# Altium PCB ZYNQ-HS-DEV-PCB.PcbDoc (part 5 of 13)
Units mm, origin at the board's own origin, x right, y up, seen from the top; angles counter-clockwise.
Board outline 125.73 x 111.93 mm, 10 copper layers (S1 (SIG), S2 (GND), S3 (SIG), S4 (GND), S5 (PWR), S6 (SIG), S7 (GND), S8 (SIG), S9 (GND), S10 (SIG)), stack 1.597 mm thick; 545 components, 400 nets, 2449 pads, 1577 vias.
Unrouted connection lines stored in the file: 309.
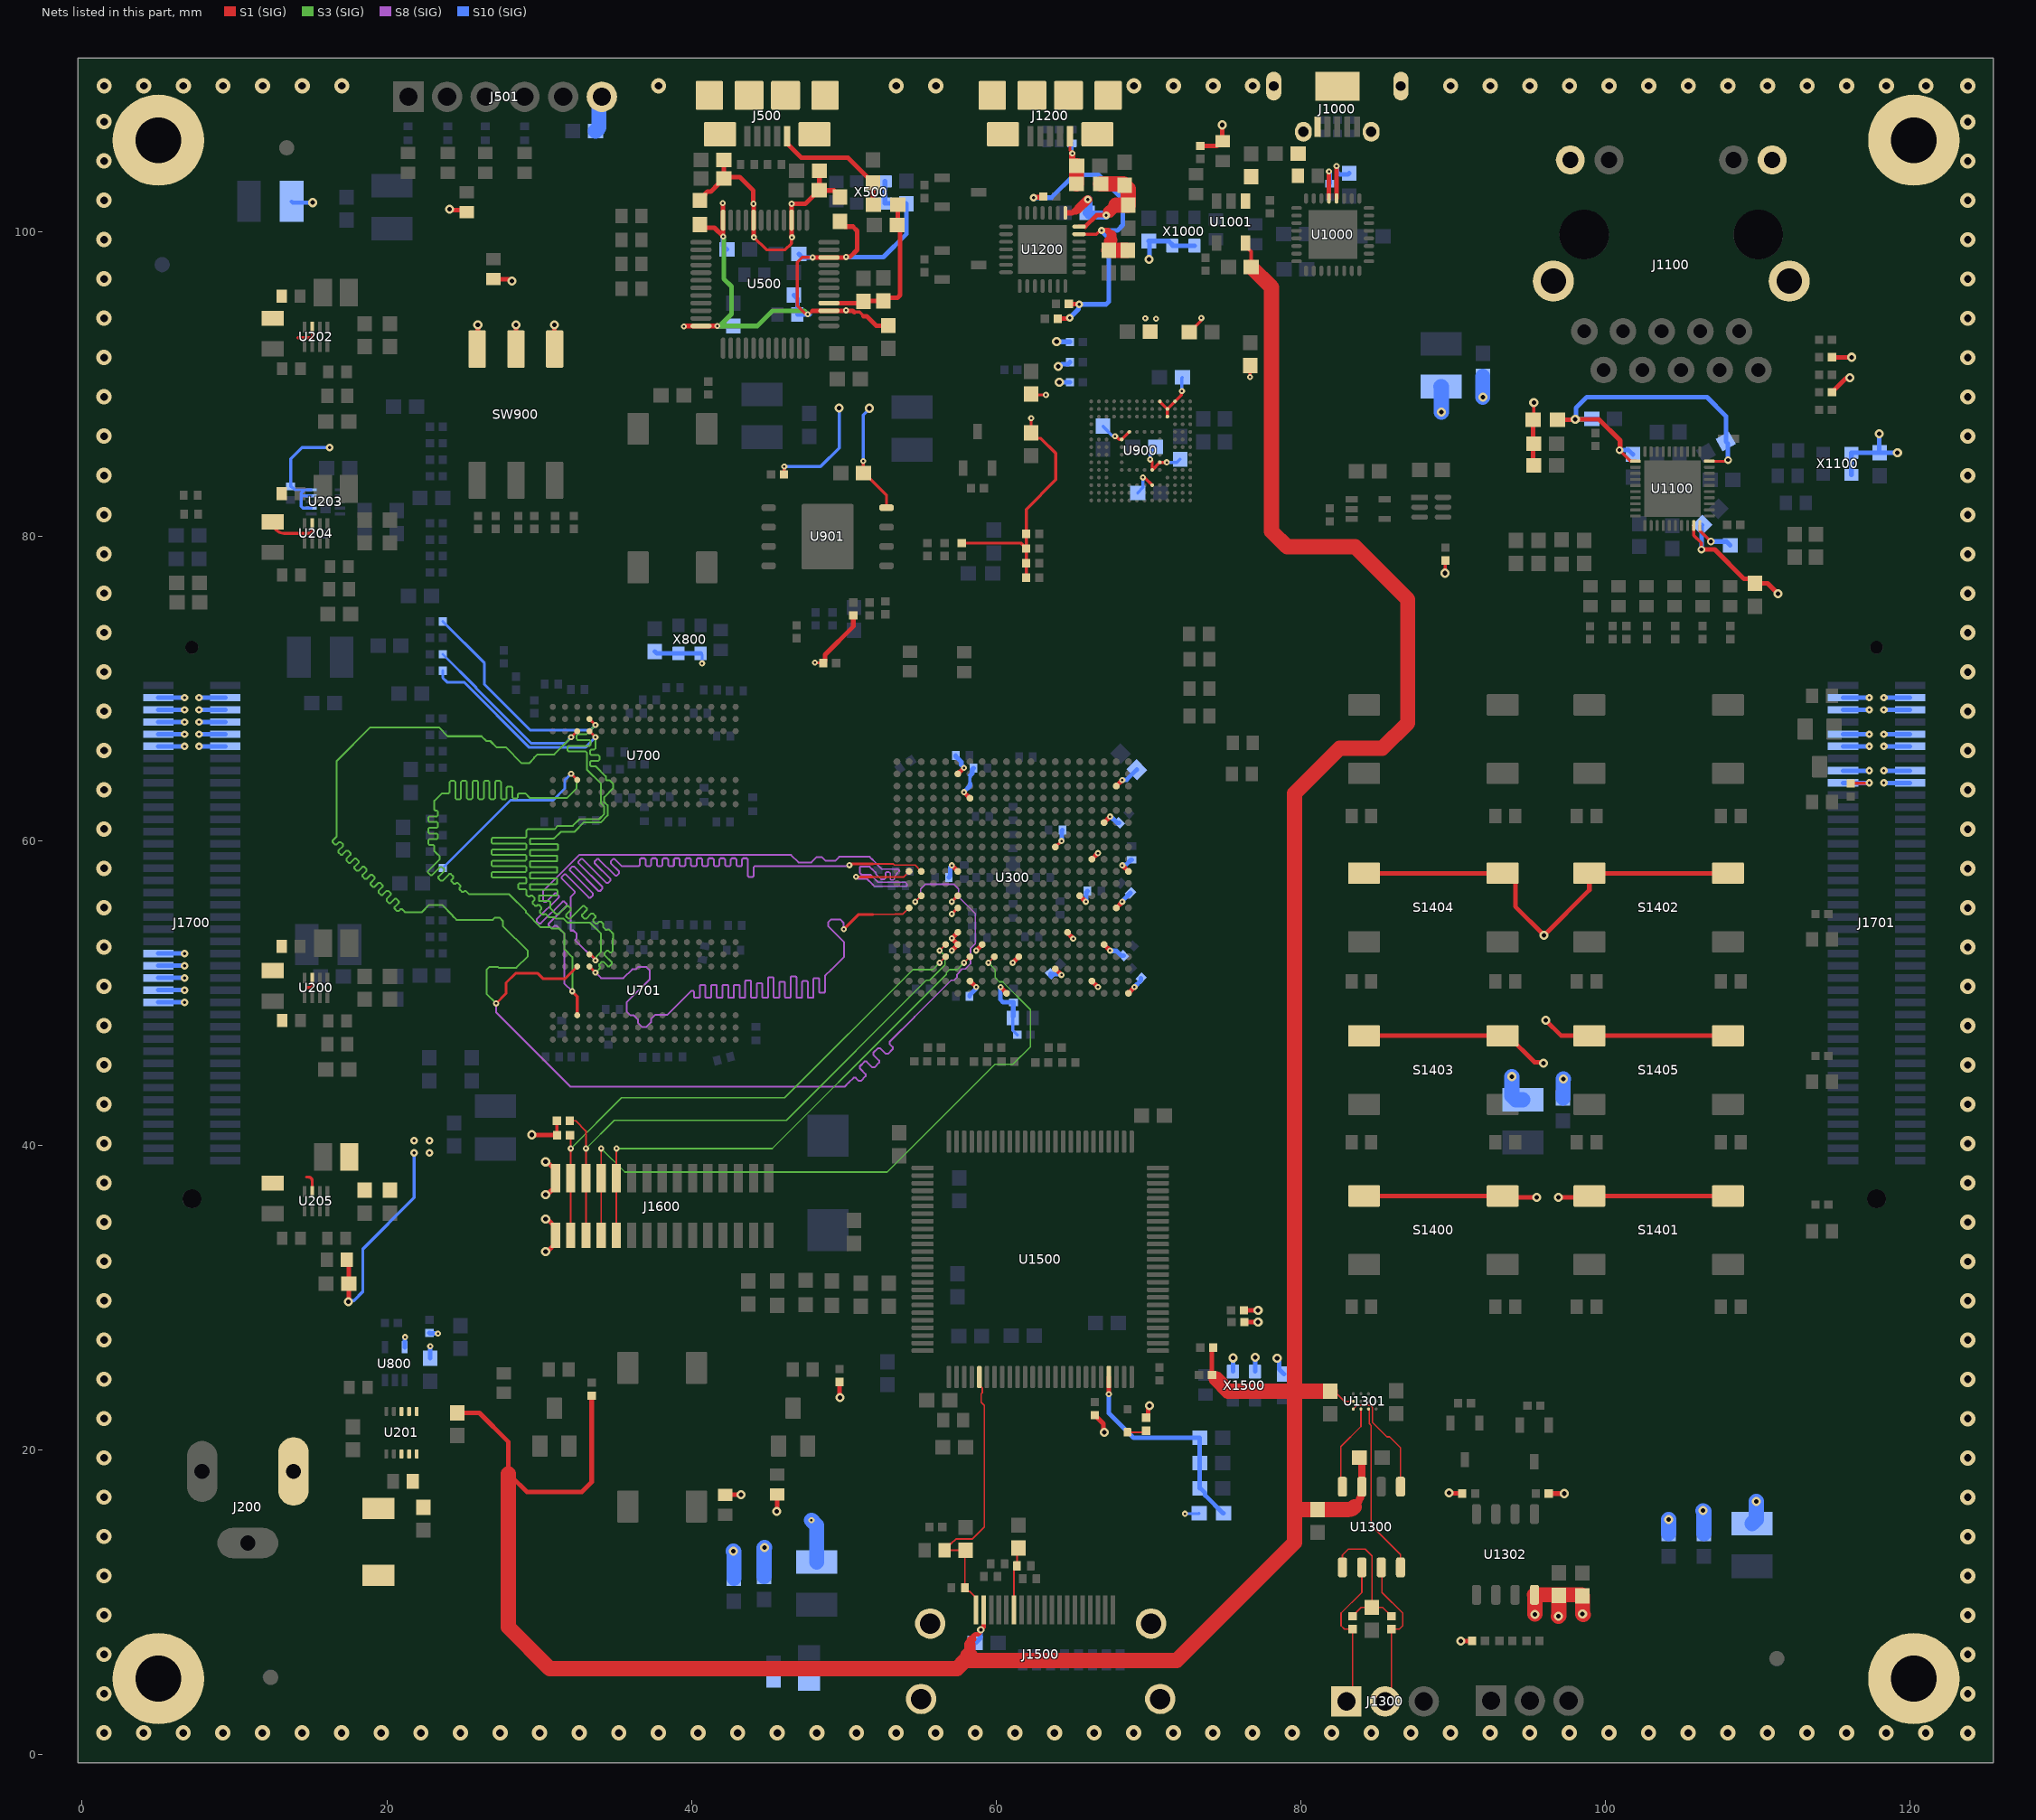
[diagram p12: the nets of this part, all layers, seen from the top]

## Via types
v1: diameter 0.4, hole 0.15, S1 (SIG) to S10 (SIG), tented both sides, 892 vias
v2: diameter 0.5, hole 0.2, S1 (SIG) to S10 (SIG), tented both sides, 231 vias
v3: diameter 0.6, hole 0.3, S1 (SIG) to S10 (SIG), tented both sides, 188 vias
v4: diameter 1, hole 0.5, S1 (SIG) to S10 (SIG), tented both sides, 158 vias
v5: diameter 0.5, hole 0.25, S1 (SIG) to S10 (SIG), tented both sides, 108 vias

## Nets (pads, with @x,y where several pads share a name; then routed paths per layer and width w, separated by ;. In a path a pad name is that pad's centre, name@x,y a point inside that pad or via, vN(x,y) a via of type N, cw(c..) or ccw(c..) an arc to the next point about the centre after c; other vN are vias at no path point) (continued)
+3V3: C211.2 C219.2 C220.2 C221.2 C302.2 C310.2 C311.2 C312.1 C324.2 C325.2 C326.2 C327.2 C328.2 C329.2 C330.2 C334.2 C335.2 C336.2 C337.2 C338.2 C339.2 C340.2 C350.2 C351.2 C352.2 C353.2 C354.2 C355.2 C356.2 C516.2 C800.2 C806.2 C900.2 C901.2 C902.2 C903.2 C904.2 C905.2 C906.2 C907.2 C908.2 C909.2 C912.2 C1000.2 C1001.2 C1008.2 C1100.2 C1101.2 C1105.2 C1106.2 C1117.2 C1305.2 C1306.2 C1520.2 FB1100.2 FB1500.1 J501.6 J1100.11 J1100.14 J1600.15 J1600.15_1 J1700.45 J1700.47 J1700.49 J1700.51 J1700.53 J1701.3 J1701.4 J1701.5 J1701.6 J1701.9 J1701.10 J1701.11 J1701.12 J1701.15 J1701.16 J1701.17 J1701.18 L203.2 R216.2 R400.2 R401.2 R402.2 R403.2 R404.2 R405.2 R801.2 R805.2 R808.1 R819.2 R900.2 R901.2 R902.2 R903.2 R904.2 R905.2 R906.2 R908.2 R909.2 R910.2 R1003.1 R1004.2 R1115.1 R1116.1 R1303.1 R1304.2 R1307.1 R1400.1 R1500.2 R1506.2 R1507.2 R1508.2 R1604.2 R1605.2 S1400.3 S1400.4 S1401.3 S1401.4 S1402.3 S1402.4 S1403.3 S1403.4 S1404.3 S1404.4 S1405.3 S1405.4 SW900.4 SW900.5 SW900.6 U203.7 U203.9 U203.10 U300.B6 U300.C19 U300.D7 U300.F18 U300.H14 U300.J17 U300.K6 U300.K20 U300.M6 U300.M16 U300.N6 U300.N19 U300.R6 U300.R15 U300.T6 U300.T8 U300.T18 U300.U11 U300.V14 U300.W7 U300.W17 U300.Y10 U300.Y20 U800.5 U900.C6 U900.E6 U900.F5 U900.J10 U900.K9 U900.M4 U900.N4 U900.P3 U900.P5 U901.8 U1000.20 U1000.21 U1100.29 U1302.8 X800.1 X800.4 X1000.1 X1000.4 X1100.1 X1100.4 X1500.1 X1500.4 | length 339.7
  S1 (SIG) w0.2: R1605.2@31.159,41.624 31.167,41.616 31.167,40.683 R1604.2@31.175,40.675 ; R908.2@46.07,84.057 46.085,84.072 46.085,84.56 v1(46.1,84.575) ; v1(48.1,71.7) 48.112,71.687 48.637,71.687 R808.1@48.65,71.675 ; v1(51.275,84.925) 51.275,84.175 C912.2@51.3,84.15 ; C912.2@51.325,84.15 52.807,82.668 U901.8@52.807,81.868 ; v1(57.088,55.195) U300.N6@57.488,55.595 ; v1(57.088,55.995) U300.M6@57.488,56.395 ; R910.2@57.742,79.547 61.62,79.547 R904.2@61.975,79.192 ; R902.2@61.975,77.275 R905.2@61.975,78.233 R904.2@61.975,79.192 ; v1(62.3,87.75) 62.3,86.792 C903.2@62.308,86.785 ; C904.2@62.3,89.325 62.35,89.275 v1(63.275,89.275) ; C903.2@62.396,86.785 62.396,86.713 62.683,86.426 62.949,86.426 63.925,85.45 63.925,83.7 61.975,81.75 R903.2@61.975,80.15 R904.2@61.975,79.192 ; U300.H14@63.888,59.595 v1(64.288,59.995) ; v1(67.811,86.564) 67.865,86.564 68.079,86.35 U900.J10@68.246,86.35 U900.K9@68.746,86.85 ; v1(69.646,83.85) 69.685,83.812 69.785,83.812 U900.C6@70.246,83.35 ; v1(70.11,85.04) 70.246,84.904 U900.E6@70.246,84.35 U900.F5@70.746,84.85 ; U900.P5@70.746,88.85 U900.N4@71.246,88.35 ; U900.F5@70.746,84.85 v1(71.2,84.85) ; U900.M4@71.246,87.85 U900.N4@71.246,88.35 ; v1(72.2,89.525) 72.162,89.487 72.162,89.266 U900.P3@71.746,88.85 U900.N4@71.246,88.35 ; C908.2@72.675,93.4 72.7,93.4 73.437,94.137 73.437,94.287 v1(73.475,94.325) ; v1(76.675,90.45) C909.2@76.675,91.2 ; v3(89.475,77.575) 89.487,77.588 89.487,78.388 R805.2@89.5,78.4 ; FB1100.2@95.25,87.65 95.3,87.7 v3(95.3,88.775) ; U1100.29@105.8,80.7 105.8,80.05 106.3,79.55 v5(106.3,79.125) ; R819.2@116.101,63.76 116.121,63.78 117.305,63.78 v2(117.325,63.8)
  S1 (SIG) w0.3: R216.2@17.368,32.496 17.509,32.496 C219.2@17.509,30.942 17.509,29.75 v3(17.475,29.75) ; v3(24.125,101.475) 24.182,101.418 25.106,101.418 R400.2@25.236,101.288 ; SW900.6@25.936,92.284 25.975,92.323 v3(25.975,93.875) ; R401.2@27,96.876 28.018,96.876 28.144,96.75 v3(28.225,96.75) ; v3(28.475,93.875) SW900.5@28.476,92.284 SW900.5@28.476,92.284 ; v3(29.525,40.7) 29.537,40.688 31.163,40.688 R1604.2@31.175,40.675 ; v3(30.425,33.025) 30.482,33.082 30.582,33.082 31.075,33.575 J1600.15_1@31.075,34.1 ; v3@30.582,35.118 J1600.15_1@31.075,34.625 ; v3@30.582,36.832 J1600.15@31.075,37.325 ; v3@30.582,38.868 J1600.15@31.075,38.375 ; v3(31,93.875) 31,92.3 SW900.4@31.016,92.284 ; R403.2@42.225,17.05 42.238,17.063 43.238,17.063 v3(43.25,17.075) ; v3(45.6,15.975) 45.625,15.975 R405.2@45.625,17.1 ; R808.1@48.65,71.675 48.775,71.8 48.775,72.225 50.625,74.075 R909.2@50.625,74.8 ; R404.2@49.725,24.475 49.725,23.45 v3(49.75,23.45) ; v1(57.088,52.795) U300.T6@57.488,53.195 v1(57.088,53.595) U300.R6@57.488,53.995 ; v1(57.088,58.395) U300.K6@57.488,57.995 ; U300.B6@57.488,64.395 v1(57.888,64.795) ; v1(57.888,63.195) U300.D7@58.288,62.795 ; U300.W7@58.288,50.795 v1(58.688,50.395) ; v1(58.688,52.795) U300.T8@59.088,53.195 ; v1(60.288,50.395) U300.Y10@60.688,49.995 ; v1(61.088,51.995) U300.U11@61.488,52.395 ; U300.V14@63.888,51.595 v1(64.288,51.195) ; U300.R15@64.688,53.995 64.688,53.969 65.061,53.595 v1(65.061,53.569) ; U300.M16@65.488,56.395 v1(65.888,55.995) ; U300.W17@66.288,50.795 v1(66.688,50.395) ; U300.J17@66.288,58.795 v1(66.688,59.195) ; R1508.2@66.475,22.3 67.043,21.732 67.043,21.232 v3(67.1,21.175) ; U300.T18@67.088,53.195 v1(67.488,52.795) ; U300.F18@67.088,61.195 v1(67.488,61.595) ; U300.N19@67.888,55.595 v1(68.288,55.995) ; U300.C19@67.888,63.595 v1(68.288,63.995) ; v1(68.288,58.395) U300.K20@68.688,57.995 ; U300.Y20@68.688,49.995 v1(69.088,50.395) ; R1500.2@69.85,22.125 69.975,22.25 69.975,22.744 70.075,22.844 v3(70.075,22.925) ; R1003.1@73.4,105.625 74.5,105.625 74.8,105.925 R1004.2@74.875,105.925 74.85,105.95 v3(74.85,107) ; R1507.2@76.275,29.175 v3(77.2,29.175) v3@77.225,29.2 ; R1506.2@76.3,28.4 v3(77.2,28.4) ; U1000.21@81.85,102.175 v1(81.85,103.95) ; U1000.20@82.35,102.175 v1(82.35,104.3) ; S1400.3@84.158,36.683 S1400.4@93.258,36.683 93.341,36.6 v3(95.5,36.6) ; S1403.3@84.158,47.2 S1403.4@93.258,47.2 93.608,47.2 95.35,45.457 95.868,45.457 v3(95.925,45.4) ; S1404.3@84.158,57.875 S1404.4@93.258,57.875 93.538,57.875 94.088,57.325 94.088,55.687 v3(95.975,53.8) 98.947,56.772 S1402.3@98.947,57.875 S1402.4@108.047,57.875 ; v3(89.725,17.2) 89.75,17.175 90.575,17.175 R1307.1@90.6,17.15 ; v3(90.5,7.475) R1304.2@91.25,7.475 ; FB1100.2@95.25,87.65 95.25,84.705 C1106.2@95.3,84.655 ; v3(96.075,48.225) 97.1,47.2 S1405.3@98.947,47.2 S1405.4@108.047,47.2 ; R1303.1@96.275,17.15 v3(97.3,17.15) ; v3(96.925,36.6) 98.863,36.6 S1401.3@98.947,36.683 S1401.4@108.047,36.683 ; v5(106.3,79.125) 107.175,79.125 109.107,77.193 109.532,77.193 C1101.2@109.825,76.9 110.65,76.9 v3(111.325,76.225) ; R1115.1@114.875,89.45 115.768,90.343 115.993,90.343 v3(116.05,90.4) ; R1116.1@114.875,91.75 v3(116.175,91.75)
  S1 (SIG) w1: v3(95.375,9.225) 95.375,10.47 U1302.8@95.345,10.5 98.425,10.5 C1306.2@98.5,10.425 v3(98.5,9.25) v3@98.55,9.2 ; v3(96.925,9.1) 96.95,9.125 C1305.2@96.95,10.45
  S10 (SIG) w0.11: J1700.53@5,49.4 v2(6.725,49.4) ; J1700.51@5,50.2 v2(6.725,50.2) ; J1700.49@5,51 v2(6.725,51) ; J1700.47@5,51.8 v2(6.725,51.8) ; J1700.45@5,52.6 v2(6.725,52.6) ; J1701.17@115.6,63.8 v2(117.325,63.8) ; J1701.15@115.6,64.6 v2(117.325,64.6) ; J1701.11@115.6,66.2 v2(117.325,66.2) ; J1701.9@115.6,67 v2(117.325,67) ; J1701.5@115.6,68.6 v2(117.325,68.6) ; J1701.3@115.6,69.4 v2(117.325,69.4) ; v2(118.275,63.8) J1701.18@120,63.8 ; v2(118.275,64.6) J1701.16@120,64.6 ; v2(118.275,66.2) J1701.12@120,66.2 ; v2(118.275,67) J1701.10@120,67 ; v2(118.275,68.6) J1701.6@120,68.6 ; v2(118.275,69.4) J1701.4@120,69.4
  S10 (SIG) w0.2: C211.2@13.685,83.275 13.685,85.085 14.425,85.825 v2(16.25,85.825) ; C211.2@13.735,83.275 13.96,83.05 14.614,83.05 ; U203.7@15.035,81.85 14.492,81.85 14.375,81.967 14.375,82.65 ; U203.9@15.035,82.65 14.375,82.65 ; U203.10@15.035,83.05 14.614,83.05 ; v3(17.475,29.75) 17.549,29.824 17.849,29.824 18.425,30.4 18.425,33.209 21.8,36.584 v2(21.8,39.525) ; X800.4@40.6,72.3 40.7,72.2 v1(40.7,71.65) ; v1(46.1,84.575) 48.475,84.575 49.7,85.8 v3(49.7,88.425) ; v1(51.275,84.925) 51.275,87.951 51.675,88.351 v3(51.675,88.4) ; 58.288,63.758 58.288,64.139 58.294,64.146 58.294,64.17 58.297,64.173 58.297,64.292 ; R402.2@61.1,48.475 61.1,47.561 R1400.1@61.396,47.265 ; C902.2@67.025,87.225 67.025,87.2 67.622,86.603 67.772,86.603 v1(67.811,86.564) ; C905.2@69.3,82.825 69.3,82.85 69.646,83.196 v1(69.646,83.85) ; v1(70.11,85.04) 70.11,85.514 C901.2@70.471,85.875 ; v1(71.2,84.85) 71.875,84.85 C900.2@72.075,85.05 ; v1(72.2,89.525) 72.2,90.4 C907.2@72.225,90.425 ; v1(72.4,15.825) 73.3,15.825 FB1500.1@73.325,15.85 ; 14.375,82.65 14.375,82.811 14.614,83.05
  S10 (SIG) w0.254: C302.2@13.75,101.975 13.825,101.9 v3(15.125,101.9)
  S10 (SIG) w0.3: J1700.53@5,49.4 v2(6.725,49.4) ; J1700.51@5,50.2 v2(6.725,50.2) ; J1700.49@5,51 v2(6.725,51) ; J1700.47@5,51.8 v2(6.725,51.8) ; J1700.45@5,52.6 v2(6.725,52.6) ; U800.5@21.175,26.75 21.188,26.763 21.188,27.413 v1(21.2,27.425) ; R801.2@22.8,27.7 22.831,27.669 23.331,27.669 v1(23.35,27.65) ; C800.2@22.85,26.025 v1(22.85,26.825) ; C806.2@37.6,72.425 37.725,72.3 X800.1@39.15,72.3 X800.4@40.6,72.3 ; C356.2@56.9,57.6 57,57.7 57,58.28 57.088,58.368 v1(57.088,58.395) ; C355.2@57.35,65.6 57.35,65.55 57.596,65.304 57.596,65.3 57.715,65.182 57.715,64.995 57.888,64.822 v1(57.888,64.795) ; v1(57.888,63.195) 57.888,63.222 58.288,63.622 58.288,63.758 ; C337.2@58.25,49.8 58.25,49.85 58.668,50.268 58.668,50.376 v1(58.688,50.395) ; 58.297,64.292 58.425,64.42 58.425,64.675 C310.2@58.525,64.775 ; v1(60.288,50.395) 60.288,49.576 60.463,49.4 C338.2@61.15,49.4 61.125,49.375 61.125,48.5 R402.2@61.1,48.475 ; C329.2@63.625,51.097 63.582,51.14 C329.2@63.582,51.282 63.617,51.246 64.209,51.246 64.261,51.195 v1(64.288,51.195) ; v3(63.975,92.775) 63.988,92.762 64.838,92.762 R906.2@64.85,92.75 ; v3(64.075,91.15) 64.156,91.15 64.306,91.3 64.725,91.3 R901.2@64.85,91.425 ; v3(64.15,90.1) R900.2@64.85,90.1 ; v1(64.288,59.995) 64.307,60.014 64.307,60.657 C327.2@64.35,60.7 ; v1(65.888,55.995) 65.907,56.014 65.907,56.607 C330.2@66,56.7 ; v1(67.488,52.795) 67.507,52.776 67.91,52.776 68.222,52.464 C339.2@68.364,52.464 ; v1(67.488,61.595) 67.507,61.576 67.547,61.576 67.94,61.182 C328.2@68.082,61.182 ; v1(68.288,55.995) 68.307,56.014 68.307,56.07 C354.2@68.818,56.582 ; v1(68.288,58.395) 68.307,58.414 68.514,58.414 68.85,58.75 C353.2@68.9,58.75 ; v1(68.288,63.995) 68.307,64.014 68.575,64.014 C326.2@69.23,64.67 ; v1(69.088,50.395) 69.088,50.422 69.518,50.852 C340.2@69.518,50.982 ; v3(70.05,98.175) 70.075,98.2 70.075,99.325 C1008.2@70.025,99.375 71.328,99.375 71.578,99.125 X1000.1@71.578,99.075 X1000.4@73.028,99.075 ; X1500.4@75.55,25.16 v3(75.55,26.05) ; X1500.1@77,25.16 v3(77,26.1) ; v3(78.45,26.025) 78.45,25.944 78.575,25.819 78.575,25.325 C1520.2@78.9,25 ; v1(81.85,103.95) 81.85,103.923 81.9,103.873 C1001.2@81.9,103.15 ; v1(82.35,104.3) 82.369,104.281 82.369,103.931 82.55,103.75 83.1,103.75 C1000.2@83.175,103.825 ; v5(106.3,79.125) 106.327,79.152 106.327,80.727 C1100.2@106.345,80.745 ; J1701.17@115.6,63.8 v2(117.325,63.8) ; J1701.15@115.6,64.6 v2(117.325,64.6) ; J1701.11@115.6,66.2 v2(117.325,66.2) ; J1701.9@115.6,67 v2(117.325,67) ; J1701.5@115.6,68.6 v2(117.325,68.6) ; J1701.3@115.6,69.4 v2(117.325,69.4) ; X1100.1@116.15,84.025 X1100.4@116.15,85.475 C1117.2@118,85.475 ; v3(117.975,86.725) 117.975,85.5 C1117.2@118,85.475 ; v2(118.275,63.8) J1701.18@120,63.8 ; v2(118.275,64.6) J1701.16@120,64.6 ; v2(118.275,66.2) J1701.12@120,66.2 ; v2(118.275,67) J1701.10@120,67 ; v2(118.275,68.6) J1701.6@120,68.6 ; v2(118.275,69.4) J1701.4@120,69.4 ; v3(119.175,85.475) C1117.2@118,85.475
  S10 (SIG) w1: C516.2@33.7,106.6 33.924,106.824 33.924,108.659 J501.6@34.115,108.85 ; v3(42.75,13.375) 42.793,13.332 C336.2@42.793,11.577 ; C335.2@44.769,11.702 44.769,13.569 v3(44.8,13.6) ; v1(47.875,15.4) 48.218,15.057 C334.2@48.218,12.65 ; C324.2@89.206,89.825 89.225,89.806 v3(89.225,88.15) ; v3(91.95,89.125) C325.2@91.95,90.5 ; v3(93.85,44.525) 93.85,43.275 94.125,43 C312.1@94.575,43 ; C311.2@97.225,43.125 97.225,44.35 v3(97.25,44.375) ; C352.2@104.139,14.525 104.15,14.536 v3(104.15,15.45) ; v3(106.4,16.025) 106.457,15.968 C351.2@106.457,14.525 ; C350.2@109.625,15.175 109.9,15.45 v3(109.9,16.625)
  other v1: 70.5,94.275 69.8,94.3
  other v2: 22.8,39.525 21.8,40.325 22.8,40.325
  other v3: 30.425,35.175 30.425,36.775 30.425,38.925
+3V3_ETH: C1102.2 C1103.2 C1104.2 FB1100.1 U1100.11 U1100.40 | length 24.4
  S1 (SIG) w0.2: v5(100.925,85.65) 101.65,84.925 U1100.11@101.975,84.925 ; U1100.40@106.835,84.915 108.05,84.915 v5(108.05,85)
  S1 (SIG) w0.3: FB1100.1@96.85,87.65 98.2,87.65 98.225,87.675 99.575,87.675 100.975,86.275 100.963,86.263 100.963,85.688 v5(100.925,85.65)
  S10 (SIG) w0.3: C1103.2@99.102,87.697 99.08,87.675 v3(98.025,87.675) 98.075,87.725 98.075,88.425 98.775,89.125 106.675,89.125 107.912,87.888 107.912,86.212 108.05,86.075 v5(108.05,85) ; v5(100.925,85.65) 101.525,85.65 C1102.2@101.8,85.375
+3V3_FTDI: C508.2 C509.2 C510.2 C511.2 C512.2 C515.2 FB501.2 FB502.2 R504.1 U500.12 U500.24 U500.39 U500.46 X500.1 X500.4 | length 50.3
  S1 (SIG) w0.2: 47.952,94.8 47.696,94.544 47.531,94.544 46.95,95.125 46.95,97.975 47.275,98.3 v1(47.952,98.3) ; 50.686,94.711 51.039,94.711 51.3,94.45
  S1 (SIG) w0.3: v1(39.5,93.775) 39.527,93.775 39.552,93.8 U500.24@40.625,93.8 v1(41.698,93.8) ; FB501.2@40.55,100.6 40.55,100.575 40.875,100.25 41.502,100.25 v1(42.075,99.677) U500.12@42.075,100.75 42.075,101.823 42.05,101.848 v1(42.05,101.875) ; 47.952,94.8 U500.39@49.025,94.8 50.098,94.8 50.123,94.825 v1(50.15,94.825) 50.169,94.806 50.591,94.806 50.686,94.711 ; v1(47.952,98.3) U500.46@49.025,98.3 50.098,98.3 50.123,98.325 v1(50.15,98.325) 50.169,98.344 50.419,98.344 50.875,98.8 50.875,100.05 50.6,100.325 50.075,100.325 49.75,100.65 FB502.2@49.75,100.675 ; 51.3,94.45 51.5,94.45 52.125,93.825 C508.2@52.925,93.825
  S3 (SIG) w0.3: v1(41.698,93.8) 41.717,93.819 41.853,93.819 42.625,94.591 42.625,96.389 42.125,96.889 42.125,99.6 42.075,99.65 v1(42.075,99.677) ; v1@41.853,93.8 44.325,93.8 45.325,94.8 47.4,94.8 v1(47.628,94.572)
  S10 (SIG) w0.3: v1(41.698,93.8) C512.2@42.75,93.8 ; v1(42.075,99.677) 42.075,99.075 C511.2@42.325,98.825 ; C509.2@46.725,95.825 46.95,95.6 R504.1@46.95,94.55 v1@47.774,94.55 ; C510.2@47.05,98.525 47.275,98.3 v1(47.952,98.3) ; v1(50.15,98.325) 52.6,98.325 54.1,99.825 C515.2@54.1,101.825 54.075,101.85 X500.1@52.7,101.85 X500.4@52.7,103.3
+3V3_HDMI: C1500.2 C1501.2 C1502.2 FB1500.2 U1500.47 | length 14.6
  S1 (SIG) w0.3: v1(67.4,23.675) U1500.47@67.4,24.8
  S10 (SIG) w0.3: v1(67.4,23.675) 67.4,22.425 69.025,20.8 C1502.2@73.375,20.8 C1501.2@73.375,19.15 C1500.2@73.375,17.5 ; C1500.2@73.4,17.5 73.725,17.175 73.725,17.025 74.9,15.85 FB1500.2@74.925,15.85
+3V_UART: C1202.2 C1203.2 R1200.1 R1202.2 R1203.1 U1200.6 | length 25.3
  S1 (SIG) w0.2: U1200.6@65.45,99.825 66.594,99.825 66.844,100.075 v2(66.925,100.075)
  S1 (SIG) w0.3: R1203.1@64.05,94.275 64.075,94.3 64.8,94.3 v2(64.825,94.325) ; R1200.1@64.775,95.25 64.788,95.237 65.438,95.237 v2(65.45,95.225) ; v2(66.925,100.075) 66.95,100.1 67.275,100.1 67.35,100.025
  S1 (SIG) w0.35: v2(62.45,102.225) 62.479,102.254 63.054,102.254 R1202.2@63.1,102.3
  S1 (SIG) w0.45: 67.35,100.025 67.575,99.8 67.575,99.775
  S1 (SIG) w0.65: 67.575,99.45 67.575,99.775
  S1 (SIG) w0.8: C1202.2@67.4,98.8 67.475,98.875 67.475,99.35 67.575,99.45
  S1 (SIG) w1: C1202.2@67.4,98.775 68.575,98.775 C1203.2@68.6,98.75
  S10 (SIG) w0.3: v2(62.45,102.225) 63.625,102.225 65.125,103.725 66.725,103.725 68.325,102.125 68.325,100.425 67.975,100.075 v2(66.925,100.075) 66.925,100.035 67.4,99.56 67.4,95.401 67.224,95.225 v2(65.45,95.225) 65.412,95.187 65.412,94.912 v2(64.825,94.325)
+5V: C203.2 C205.2 C210.2 C218.2 C222.2 C1007.2 C1300.2 C1302.2 C1303.2 C1511.2 J1500.18 J1700.3 J1700.4 J1700.5 J1700.6 J1700.7 J1700.8 J1700.9 J1700.10 J1700.11 J1700.12 R200.2 R202.2 R208.2 R210.2 R214.2 R1503.2 R1504.2 U200.7 U201.6 U201.7 U201.8 U202.7 U204.7 U205.7 U1001.5 U1300.3 U1301.A2 | length 245.8
  S1 (SIG) w0.11: C1302.2@82.225,23.85 82.875,23.2 U1301.A2@83.45,23.2
  S1 (SIG) w0.2: C218.2@12.514,80.936 ccw(c13.257,80.936) 13.257,80.193 14.908,80.193 ccw(c14.908,80.385) 15.1,80.385 U204.7@15.1,80.836 ; 14.15,93.025 15.1,93.025 U202.7@15.1,93.725 ; 14.725,37.925 14.875,37.925 cw(c14.875,37.7) 15.1,37.7 U205.7@15.1,36.975 ; 14.734,50.363 14.999,50.363 ccw(c14.999,50.431) 15.068,50.431 ccw(c15.068,50.464) 15.1,50.464 U200.7@15.1,51
  S1 (SIG) w0.254: U1001.5@76.375,99.25 76.375,99.05 76.75,98.675 C1007.2@76.75,97.675
  S1 (SIG) w0.3: C205.2@24.613,22.45 26.075,22.45 27.967,20.558 27.967,18.451 28.143,18.275 28.175,18.275 29.2,17.25 32.8,17.25 33.45,17.9 R210.2@33.45,23.575 ; 58.45,7.6 58.45,7.65 cw(c58.7,7.65) 58.7,7.9 ccw(c58.7,8.2) 59,8.2 v5(59,8.204) 59.175,8.379 J1500.18@59.175,9.513 ; R1503.2@74.175,24.935 74.175,26.544 cw(c74.431,26.544) R1504.2@74.25,26.725
  S1 (SIG) w0.5: 58.284,7.246 58.284,7.434 cw(c58.45,7.434) 58.45,7.6 ; 83.525,16.275 ccw(c82.354,17.446) U1300.3@84.01,17.446 ; C1300.2@83.85,19.5 cw(c83.464,19.114) 84.01,19.114 U1300.3@84.01,17.6
  S1 (SIG) w0.75: 58.15,6.675 ccw(c58.15,6.809) 58.284,6.809 58.284,7.246
  S1 (SIG) w1: 27.967,18.451 27.967,8.383 30.692,5.658 57.423,5.658 57.952,6.187 71.852,6.187 79.6,13.936 79.6,16.1 ; 58.15,6.525 58.284,6.525 ; 74.45,24.66 75.235,23.875 79.6,23.875 ; C1007.2@76.75,97.675 78.075,96.35 78.075,80.325 79.1,79.3 83.564,79.3 87.025,75.839 87.025,67.746 85.354,66.075 82.55,66.075 79.6,63.125 79.6,24.332 ; C1302.2@81.925,23.875 79.6,23.875 ; 83.525,16.275 cw(c83.103,16.697) 83.103,16.1 C1303.2@81.1,16.1 79.6,16.1 ; 79.6,16.1 79.6,23.875
  S10 (SIG) w0.11: J1700.11@5,66.2 v2(6.725,66.2) ; J1700.9@5,67 v2(6.725,67) ; J1700.7@5,67.8 v2(6.725,67.8) ; J1700.5@5,68.6 v2(6.725,68.6) ; J1700.3@5,69.4 v2(6.725,69.4) ; v2(7.675,66.2) J1700.12@9.4,66.2 ; v2(7.675,67) J1700.10@9.4,67 ; v2(7.675,67.8) J1700.8@9.4,67.8 ; v2(7.675,68.6) J1700.6@9.4,68.6 ; v2(7.675,69.4) J1700.4@9.4,69.4
  S10 (SIG) w0.3: J1700.11@5,66.2 v2(6.725,66.2) ; J1700.9@5,67 v2(6.725,67) ; J1700.7@5,67.8 v2(6.725,67.8) ; J1700.5@5,68.6 v2(6.725,68.6) ; J1700.3@5,69.4 v2(6.725,69.4) ; v2(7.675,66.2) J1700.12@9.4,66.2 ; v2(7.675,67) J1700.10@9.4,67 ; v2(7.675,67.8) J1700.8@9.4,67.8 ; v2(7.675,68.6) J1700.6@9.4,68.6 ; v2(7.675,69.4) J1700.4@9.4,69.4 ; C1511.2@58.625,7.35 58.65,7.35 58.975,7.675 58.975,8.179 v5(59,8.204)
+5V_FTDI: C500.2 C501.2 C507.2 FB500.2 U500.40 | length 10.9
  S1 (SIG) w0.3: U500.40@49.025,95.3 51.175,95.3 C500.2@51.3,95.425 51.325,95.45 C501.2@52.6,95.45 52.8,95.65 53.524,95.65 53.7,95.826 53.7,100.225 C507.2@53.5,100.425 53.55,100.475 FB500.2@53.55,101.775
+5V_UART: C1200.2 C1201.2 C1205.2 FB1200.2 U1200.7 U1200.8 | length 10.4
  S1 (SIG) w0.25: U1200.7@65.45,100.325 U1200.7@65.85,100.325
  S1 (SIG) w0.3: U1200.7@65.85,100.325 66.6,101.075 v2(67.225,101.075)
  S1 (SIG) w0.35: 64.675,101.225 65.001,101.225 65.101,101.325 65.164,101.325
  S1 (SIG) w0.45: 65.164,101.325 65.238,101.325 65.388,101.475
  S1 (SIG) w0.6: 65.388,101.475 66.013,102.1 v2(66.025,102.1)
  S1 (SIG) w0.8: 67.425,101.3 67.45,101.3 67.875,101.725
  S1 (SIG) w1: FB1200.2@66.875,103.125 68.35,103.125 C1205.2@68.425,103.05 68.675,102.8 C1200.2@68.675,101.725 67.875,101.725
  S10 (SIG) w0.6: v2(66.025,102.1) 66.025,101.275 C1201.2@65.975,101.225 66.125,101.075 v2(67.225,101.075)
+PWRIN: D200.A J200.1
+REGOUT_ETH: L1100.1 U1100.30 | length 2.7
  S1 (SIG) w0.2: U1100.30@106.2,80.7 106.2,80.375 v5(106.925,79.65)
  S10 (SIG) w0.3: v5(106.925,79.65) 107.95,79.65 L1100.1@108.2,79.4
+VBUS_UART: C1204.2 D1200.2 FB1200.1 J1200.1 | length 4
  S1 (SIG) w0.2: J1200.1@64.85,106.262 64.85,105.329 65,105.179 v1(65,105.125)
  S1 (SIG) w0.4: v1(65,105.125) 65,104.6 65.275,104.325 C1204.2@65.3,104.325
  S1 (SIG) w1: FB1200.1@65.275,103.125 65.275,104.3 C1204.2@65.3,104.325
  S10 (SIG) w0.2: D1200.2@64.981,105.793 64.99,105.783 64.99,105.135 v1(65,105.125)
+VCC: C204.2 D200.C R203.1 U201.3 U201.4 U201.5
+VPHY_FTDI: C502.2 C503.2 C504.2 C505.2 FB501.1 FB502.1 U500.3 U500.8 | length 19.3
  S1 (SIG) w0.2: v1(44.1,99.625) 44.925,98.8 46.15,98.8 46.562,99.212 46.562,99.587 v1(46.6,99.625)
  S1 (SIG) w0.3: FB501.1@40.55,102.2 40.675,102.2 40.875,102.4 40.875,102.45 41.051,102.626 41.276,102.626 41.775,103.125 41.775,103.15 42.1,103.475 C502.2@42.125,103.475 ; C503.2@42.125,104.675 42.125,103.575 43.175,103.575 44.056,102.694 44.056,101.842 v1(44.075,101.823) U500.8@44.075,100.75 44.075,99.677 44.1,99.652 v1(44.1,99.625) ; v1(46.6,99.625) 46.6,99.652 46.575,99.677 U500.3@46.575,100.75 v1(46.575,101.823) 47.473,101.823 48.35,102.7 C505.2@48.375,102.7 ; C504.2@48.4,103.975 48.4,102.725 C505.2@48.375,102.7 ; FB502.1@49.75,102.275 49.75,102.3 49.35,102.7 C505.2@48.375,102.7
+VUSB_FTDI: C506.2 FB500.1 J500.1 | length 8.6
  S1 (SIG) w0.3: J500.1@46.275,106.262 46.275,105.787 47.213,104.85 50.275,104.85 51.575,103.55 51.6,103.55 51.925,103.225 C506.2@51.925,103.2 51.925,101.8 FB500.1@51.95,101.775
+VUSB_OTG: C1005.2 C1006.2 J1000.1 R1000.2 U1001.1
C_HEAC_N: C1518.2 D1506.2 J1500.19 R1505.2 U1500.30 | length 19
  S1 (SIG) w0.11: D1506.2@57.95,10.925 58.145,10.73 58.258,10.73 58.675,10.313 J1500.19@58.675,9.513 ; D1506.2@57.95,10.975 57.95,13.375 C1518.2@58,13.425 57.95,13.425 R1505.2@56.625,13.425 56.625,13.5 56.97,13.845 57.045,13.845 57.375,14.175 58.45,14.175 59.225,14.95 59.225,22.927 59.02,23.132 59.02,23.693 59.095,23.768 59.095,24.066 59.018,24.142 58.993,24.142 58.9,24.236 U1500.30@58.9,24.8
C_HEAC_P: C1519.2 D1503.2 J1500.14 | length 4.2
  S1 (SIG) w0.11: J1500.14@61.175,9.513 61.175,12.15 61.375,12.35 61.375,13.475 C1519.2@61.475,13.575
CAM_CLK: J1600.12 J1600.12_1 U300.U9 | length 45.3
  S1 (SIG) w0.11: J1600.12_1@34.075,34.1 J1600.12@34.075,37.85 v1(34.075,39.8) ; v1(59.488,51.995) U300.U9@59.888,52.395
  S3 (SIG) w0.1: v1(34.075,39.8) 35.625,38.25 52.85,38.25 59.925,45.325 61.1,45.325 62.25,46.475 62.25,48.45 62.25,48.927 60.433,50.745 60.223,50.745 59.938,51.03 59.938,51.545 v1(59.488,51.995)
CAM_GPIO: J1600.11 J1600.11_1 U300.U7 | length 34.2
  S1 (SIG) w0.11: J1600.11_1@35.075,34.1 J1600.11@35.075,37.85 v1(35.075,39.8) ; v1(57.888,51.995) U300.U7@58.288,52.395
  S3 (SIG) w0.1: v1(35.075,39.8) 45.3,39.8 53.95,48.45 56.738,51.238 56.738,51.34 56.943,51.545 57.438,51.545 v1(57.888,51.995)
CAM_SCL: J1600.13 J1600.13_1 R1605.1 U300.T5 | length 38.4
  S1 (SIG) w0.11: R1605.1@32.009,41.624 32.401,41.624 33.075,40.95 v1(33.075,39.8) J1600.13@33.075,37.85 J1600.13_1@33.075,34.1 ; v1(56.288,52.795) U300.T5@56.688,53.195
  S3 (SIG) w0.1: v1(33.075,39.8) 34.925,41.65 46.225,41.65 55.42,50.845 55.633,50.845 56.638,51.85 56.638,52.063 56.638,52.445 v1(56.288,52.795)
CAM_SDA: J1600.14 J1600.14_1 R1604.1 U300.U5 | length 36.4
  S1 (SIG) w0.11: R1604.1@32.025,40.675 32.075,40.625 v1(32.075,39.8) J1600.14@32.075,37.85 J1600.14_1@32.075,34.1 ; v1(56.288,51.995) U300.U5@56.688,52.395
  S3 (SIG) w0.1: v1(32.075,39.8) 35.4,43.125 46.123,43.125 54.543,51.545 55.838,51.545 v1(56.288,51.995)
CAN_CAN_H: J1300.2 R1300.1 U1300.7 | length 10.1
  S1 (SIG) w0.1: U1300.7@85.34,12.3 85.34,10.66 86.7,9.3 86.7,8.475 86.475,8.25 R1300.1@85.95,8.25 85.95,3.905 J1300.2@86.355,3.5
CAN_CAN_L: J1300.1 R1301.1 U1300.6 | length 10.1
  S1 (SIG) w0.1: J1300.1@82.995,3.5 83.4,3.905 R1301.1@83.4,8.25 82.875,8.25 82.65,8.475 82.65,9.3 84.01,10.66 U1300.6@84.01,12.3
CAN_RX: U1300.4 U1301.B1 | length 5.7
  S1 (SIG) w0.1: U1300.4@82.74,17.6 82.625,17.715 82.625,20.224 83.95,21.549 U1301.B1@83.95,22.7
CAN_SPLIT: C1304.2 R1300.2 R1301.2 U1300.5 | length 9.5
  S1 (SIG) w0.1: U1300.5@82.74,12.3 82.74,13.115 83.125,13.5 84.225,13.5 84.675,13.05 C1304.2@84.675,9.675 ; R1301.2@83.4,9.1 83.975,9.675 C1304.2@84.675,9.675 ; R1300.2@85.95,9.1 85.375,9.675 C1304.2@84.675,9.675
CAN_STB: U1300.8 U1301.C1 | length 11.3
  S1 (SIG) w0.1: U1301.C1@84.45,22.7 84.45,22.673 84.5,22.623 84.5,21.742 84.625,21.617 84.625,15.075 86.55,13.15 U1300.8@86.55,12.3
CAN_TX: U1300.1 U1301.A1 | length 7.5
  S1 (SIG) w0.1: U1301.A1@83.45,22.7 83.7,22.95 84.554,22.95 84.7,22.804 84.7,21.825 85.65,20.875 85.837,20.875 86.55,20.162 U1300.1@86.55,17.6
CEC_DIO: D1500.A R1500.1 | length 1.3
  S1 (SIG) w0.11: D1500.A@68.625,21.175 69.75,21.175 R1500.1@69.85,21.275
CHASSIS: C357.2 J500.SH J1000.SH J1100.SH J1200.SH J1500.S1 J1500.S2 J1500.S3 J1500.S4 pad.2 R300.1
  other v4: 1.432,1.432 4.032,1.432 6.632,1.432 9.232,1.432 11.832,1.432 14.432,1.432 17.032,1.432 19.632,1.432 22.232,1.432 24.832,1.432 27.432,1.432 30.032,1.432 32.632,1.432 35.232,1.432 37.832,1.432 40.432,1.432 43.032,1.432 45.632,1.432 48.232,1.432 50.832,1.432 53.432,1.432 56.032,1.432 58.632,1.432 61.232,1.432 63.832,1.432 66.432,1.432 69.032,1.432 71.632,1.432 74.232,1.432 76.832,1.432 79.432,1.432 82.032,1.432 84.632,1.432 87.232,1.432 89.832,1.432 92.432,1.432 95.032,1.432 97.632,1.432 100.232,1.432 102.832,1.432 105.432,1.432 108.032,1.432 110.632,1.432 113.232,1.432 115.832,1.432 118.432,1.432 121.032,1.432 123.789,1.423 1.432,4.012 123.79,4.003 1.432,6.592 123.79,6.583 1.432,9.172 123.79,9.163 123.79,11.743 1.432,11.752 1.432,14.332 123.79,14.323 123.79,16.903 1.432,16.912 1.432,19.492 123.79,19.483 1.432,22.072 123.79,22.063 1.432,24.652 123.79,24.643 1.432,27.232 123.79,27.223 123.79,29.803 1.432,29.812 1.432,32.392 123.79,32.383 123.79,34.963 1.432,34.972 1.432,37.552 123.79,37.543 1.432,40.132 123.79,40.123 1.432,42.712 123.79,42.703 1.432,45.292 123.79,45.283 123.79,47.863 1.432,47.872 1.432,50.452 123.79,50.443 123.79,53.023 1.432,53.032 1.432,55.612 123.79,55.603 1.432,58.192 123.79,58.183 123.79,60.763 1.432,60.772 1.432,63.352 123.79,63.343 123.79,65.923 1.432,65.932 1.432,68.512 123.79,68.503 123.79,71.083 1.432,71.092 1.432,73.672 123.79,73.663 1.432,76.252 123.79,76.243 123.79,78.823 1.432,78.832 1.432,81.412 123.79,81.403 123.79,83.983 1.432,83.992 1.432,86.572 123.79,86.563 123.79,89.143 1.432,89.152 1.432,91.732 123.79,91.723 1.432,94.312 123.79,94.303 123.79,96.883 1.432,96.892 1.432,99.472 123.79,99.463 123.79,102.043 1.432,102.052 1.432,104.632 123.79,104.623 1.432,107.212 123.79,107.203 123.799,109.558 1.442,109.568 4.042,109.568 6.642,109.568 9.242,109.568 11.842,109.568 14.442,109.568 17.042,109.568 37.842,109.568 53.442,109.568 56.042,109.568 69.042,109.568 71.642,109.568 74.242,109.568 76.842,109.568 89.842,109.568 92.442,109.568 95.042,109.568 97.642,109.568 100.242,109.568 102.842,109.568 105.442,109.568 108.042,109.568 110.642,109.568 113.242,109.568 115.842,109.568 118.442,109.568 121.042,109.568
DDR_A0: R600.2 U300.N2 U700.N3 U701.N3 | length 118.2
  S1 (SIG) w0.11: 51.9,55.175 53.375,55.175 53.395,55.195 53.888,55.195 U300.N2@54.288,55.595
  S1 (SIG) w0.18: U701.N3@33.3,51.75 v1(33.7,51.35) ; U700.N3@33.3,67.2 v1(33.7,66.8) ; v1(50,54.2) 50.975,55.175 51.9,55.175
  S3 (SIG) w0.119: v1(33.7,51.35) 33.95,51.6 33.992,51.642 33.992,51.748 33.952,51.788 33.952,51.893 34.11,52.052 34.216,52.052 34.505,51.762 34.611,51.762 34.769,51.921 34.769,52.026 34.281,52.515 34.281,52.62 34.439,52.779 34.544,52.779 34.645,52.678 34.75,52.678 34.825,52.753 34.825,52.862 34.825,53.566 34.86,53.601 34.86,53.899 34.629,54.129 34.587,54.171 34.482,54.171 34.473,54.162 34.367,54.162 34.209,54.321 34.209,54.426 34.218,54.435 34.218,54.541 34.059,54.699 33.954,54.699 33.814,54.56 33.709,54.56 33.55,54.718 33.55,54.824 33.69,54.963 33.69,55.069 33.532,55.227 33.426,55.227 33.086,54.886 32.98,54.886 32.822,55.045 32.822,55.15 33.132,55.46 33.132,55.566 32.973,55.724 32.868,55.724 32.03,54.886 31.924,54.886 31.766,55.045 31.766,55.15 32.076,55.46 32.076,55.566 31.918,55.724 31.812,55.724 31.288,55.2 31.108,55.2 31.062,55.246 30.741,55.567 30.741,55.865 30.741,55.925 ccw(c30.622,55.925) 30.622,56.044 30.056,56.044 cw(c30.056,56.119) 29.981,56.119 29.981,56.342 cw(c30.056,56.342) 30.056,56.417 31.121,56.417 ccw(c31.121,56.492) 31.196,56.492 31.196,56.716 ccw(c31.121,56.716) 31.121,56.79 29.469,56.79 cw(c29.469,56.865) 29.394,56.865 29.394,57.089 cw(c29.469,57.089) 29.469,57.163 31.12,57.163 ccw(c31.12,57.238) 31.194,57.238 31.194,57.462 ccw(c31.12,57.462) 31.12,57.537 29.469,57.537 cw(c29.469,57.611) 29.394,57.611 29.394,57.835 cw(c29.469,57.835) 29.469,57.91 31.118,57.91 ccw(c31.118,57.984) 31.193,57.984 31.193,58.208 ccw(c31.118,58.208) 31.118,58.283 29.469,58.283 cw(c29.469,58.358) 29.394,58.358 29.394,58.582 cw(c29.469,58.582) 29.469,58.656 31.117,58.656 ccw(c31.117,58.731) 31.192,58.731 31.192,58.955 ccw(c31.117,58.955) 31.117,59.029 29.469,59.029 cw(c29.469,59.104) 29.394,59.104 29.394,59.328 cw(c29.469,59.328) 29.469,59.403 31.173,59.403 ccw(c31.173,59.477) 31.247,59.477 31.247,59.701 ccw(c31.173,59.701) 31.173,59.776 29.469,59.776 cw(c29.469,59.85) 29.394,59.85 29.394,60.074 cw(c29.469,60.074) 29.469,60.149 30.931,60.149 ccw(c30.931,60.268) 31.015,60.184 31.424,60.593 32.313,60.593 32.922,61.202 34.031,61.202 34.498,61.669 34.498,62.331 34.279,62.55 34.279,62.87 34.86,63.451 34.86,63.749 34.649,63.96 34.445,63.96 34.407,63.997 34.375,64.029 34.375,64.234 33.731,64.878 33.423,64.878 33.348,64.953 33.348,65.177 33.423,65.251 33.885,65.251 33.96,65.326 33.96,65.55 33.885,65.624 33.427,65.624 33.352,65.699 33.352,65.923 33.427,65.998 33.625,65.998 33.7,66.072 33.7,66.276 v1(33.7,66.8)
  S8 (SIG) w0.119: v1(33.7,51.35) 34.06,50.99 35.538,50.99 36.119,51.571 36.34,51.571 36.478,51.71 37.049,51.71 37.26,51.499 37.26,50.91 35.74,49.39 35.74,48.801 36.005,48.537 36.222,48.537 36.486,48.272 36.486,48.055 36.751,47.79 37.049,47.79 37.34,48.082 37.34,48.299 37.632,48.59 38.432,48.59 39.703,49.861 39.97,50.128 cw(c40.054,50.044) 40.173,50.044 40.173,49.769 ccw(c40.248,49.769) 40.248,49.694 40.472,49.694 ccw(c40.472,49.769) 40.546,49.769 40.546,50.463 cw(c40.621,50.463) 40.621,50.538 40.845,50.538 cw(c40.845,50.463) 40.919,50.463 40.919,49.769 ccw(c40.994,49.769) 40.994,49.694 41.218,49.694 ccw(c41.218,49.769) 41.293,49.769 41.293,50.463 cw(c41.367,50.463) 41.367,50.538 41.591,50.538 cw(c41.591,50.463) 41.666,50.463 41.666,49.769 ccw(c41.74,49.769) 41.74,49.694 41.964,49.694 ccw(c41.964,49.769) 42.039,49.769 42.039,50.463 cw(c42.114,50.463) 42.114,50.538 42.338,50.538 cw(c42.338,50.463) 42.412,50.463 42.412,49.769 ccw(c42.487,49.769) 42.487,49.694 42.711,49.694 ccw(c42.711,49.769) 42.785,49.769 42.785,50.463 cw(c42.86,50.463) 42.86,50.538 43.084,50.538 cw(c43.084,50.463) 43.159,50.463 43.159,49.769 ccw(c43.233,49.769) 43.233,49.694 43.457,49.694 ccw(c43.457,49.769) 43.532,49.769 43.532,50.761 cw(c43.606,50.761) 43.606,50.836 43.83,50.836 cw(c43.83,50.761) 43.905,50.761 43.905,49.769 ccw(c43.98,49.769) 43.98,49.694 44.204,49.694 ccw(c44.204,49.769) 44.278,49.769 44.278,50.571 cw(c44.353,50.571) 44.353,50.646 44.577,50.646 cw(c44.577,50.571) 44.651,50.571 44.651,49.769 ccw(c44.726,49.769) 44.726,49.694 44.95,49.694 ccw(c44.95,49.769) 45.025,49.769 45.025,50.962 cw(c45.099,50.962) 45.099,51.037 45.323,51.037 cw(c45.323,50.962) 45.398,50.962 45.398,49.769 ccw(c45.472,49.769) 45.472,49.694 45.696,49.694 ccw(c45.696,49.769) 45.771,49.769 45.771,50.669 cw(c45.846,50.669) 45.846,50.743 46.069,50.743 cw(c46.069,50.669) 46.144,50.669 46.144,49.769 ccw(c46.219,49.769) 46.219,49.694 46.443,49.694 ccw(c46.443,49.769) 46.517,49.769 46.517,51.019 cw(c46.592,51.019) 46.592,51.094 46.816,51.094 cw(c46.816,51.019) 46.89,51.019 46.89,49.769 ccw(c46.965,49.769) 46.965,49.694 47.189,49.694 ccw(c47.189,49.769) 47.264,49.769 47.264,50.714 cw(c47.338,50.714) 47.338,50.789 47.562,50.789 cw(c47.562,50.714) 47.637,50.714 47.637,49.769 ccw(c47.711,49.769) 47.711,49.694 47.935,49.694 ccw(c47.935,49.769) 48.01,49.769 48.01,50.91 cw(c48.085,50.91) 48.085,50.984 48.309,50.984 cw(c48.309,50.91) 48.383,50.91 48.383,50.097 ccw(c48.458,50.097) 48.458,50.022 48.682,50.022 ccw(c48.682,50.097) 48.756,50.097 48.756,51.082 cw(c48.876,51.082) 48.791,51.166 49.165,51.54 50.025,52.4 50.025,53.35 48.975,54.4 48.975,54.65 49.171,54.846 49.754,54.846 50,54.6 v1(50,54.2)
  S10 (SIG) w0.18: R600.2@23.675,71.166 23.675,70.696 23.95,70.421 25.065,70.421 29.356,66.13 33.03,66.13 v1(33.7,66.8)
DDR_A1: R601.2 U300.K2 U700.P7 U701.P7 | length 117.4
  S1 (SIG) w0.11: 51.9,57.615 53.908,57.615 U300.K2@54.288,57.995
  S1 (SIG) w0.18: v1(32.1,64.4) U700.P7@32.5,64 ; v1(32.175,50.125) 32.175,50.11 32.5,49.785 U701.P7@32.5,48.55 ; v1@50.8,57.675 50.86,57.615 51.9,57.615
  S3 (SIG) w0.119: v1(32.1,64.4) 32.46,64.04 32.46,63.451 31.811,62.802 29.402,62.802 29.079,63.125 28.85,63.125 28.683,63.125 28.608,63.05 28.608,62.864 28.534,62.789 28.31,62.789 28.235,62.864 28.235,63.49 28.16,63.564 27.937,63.564 27.862,63.49 27.862,62.807 27.787,62.732 27.563,62.732 27.489,62.807 27.489,63.856 27.414,63.931 27.19,63.931 27.116,63.856 27.116,62.807 27.041,62.732 26.817,62.732 26.742,62.807 26.742,63.856 26.668,63.931 26.444,63.931 26.369,63.856 26.369,62.807 26.295,62.732 26.071,62.732 25.996,62.807 25.996,63.856 25.921,63.931 25.697,63.931 25.623,63.856 25.623,62.807 25.548,62.732 25.324,62.732 25.25,62.807 25.25,63.856 25.175,63.931 24.951,63.931 24.876,63.856 24.876,62.807 24.802,62.732 24.578,62.732 24.503,62.807 24.503,63.856 24.429,63.931 24.205,63.931 24.13,63.856 24.13,63.2 24.055,63.125 23.996,63.125 23.625,63.125 23.125,62.625 23.125,62.425 23.125,62.052 23.2,61.978 23.281,61.978 23.356,61.903 23.356,61.679 23.281,61.605 22.788,61.605 22.713,61.53 22.713,61.306 22.788,61.231 23.281,61.231 23.356,61.157 23.356,60.933 23.281,60.858 22.788,60.858 22.713,60.784 22.713,60.56 22.788,60.485 23.281,60.485 23.356,60.41 23.356,60.186 23.281,60.112 22.788,60.112 22.713,60.037 22.713,59.813 22.788,59.739 23.05,59.739 23.125,59.664 23.125,59.604 23.125,59.32 23.259,59.186 23.482,58.963 23.482,58.791 22.703,58.012 22.703,57.907 22.862,57.748 22.967,57.748 23.506,58.288 23.612,58.288 23.77,58.129 23.77,58.024 23.389,57.643 23.389,57.538 23.548,57.379 23.653,57.379 24.095,57.82 24.2,57.82 24.358,57.662 24.358,57.557 24.245,57.444 24.245,57.338 24.404,57.18 24.509,57.18 24.559,57.229 24.664,57.229 24.823,57.071 24.823,56.965 24.773,56.916 24.773,56.81 24.931,56.652 25.037,56.652 25.086,56.701 25.192,56.701 25.234,56.659 25.399,56.494 28.034,56.494 29.144,55.384 29.144,55.286 30.101,54.329 30.74,54.329 30.838,54.231 31.328,54.231 31.66,53.899 31.66,52.882 32.175,52.366 v1(32.175,50.125)
  S8 (SIG) w0.1: 51.9,57.125 52,57.025 54.14,57.025 54.14,57.185 54.05,57.275 52.25,57.275 51.9,57.625 ; 51.9,58.1 52.1,57.9 52.1,57.825 52.45,57.475 52.675,57.475 52.75,57.55 52.75,57.9 52.8,57.95 52.975,57.95 53.05,57.875 53.05,57.475 53.1,57.425 53.25,57.425 53.325,57.5 53.325,57.65 53.475,57.8 53.475,57.85 53.634,58.009 53.634,58.091 53.575,58.15 52.5,58.15 51.9,58.75
  S8 (SIG) w0.119: v1(32.175,50.125) 31.65,50.65 31.65,51.191 31.66,51.201 31.66,51.499 31.65,51.509 31.65,52.791 31.66,52.801 31.66,53.099 31.65,53.109 31.65,53.591 31.66,53.601 31.66,53.899 31.167,54.392 31.125,54.434 31.019,54.434 30.88,54.294 30.774,54.294 30.616,54.453 30.616,54.558 31.803,55.746 31.803,55.851 31.645,56.01 31.539,56.01 30.107,54.577 30.001,54.577 29.843,54.736 29.843,54.841 31.288,56.287 31.288,56.392 31.13,56.55 31.024,56.55 30.455,55.981 30.35,55.981 30.275,56.056 30.275,56.675 30.275,56.725 32.625,59.075 46.537,59.075 47.029,58.583 47.871,58.583 48.225,58.936 48.56,58.936 48.794,58.702 49.456,58.702 49.704,58.95 51.7,58.95 51.9,58.75 ; v1@50.8,57.646 50.942,57.504 51.521,57.504 51.9,57.125 ; 51.9,57.625 51.75,57.775 51.175,57.775 51.05,57.9 51.05,58.275 51.075,58.3 51.7,58.3 51.9,58.1
  S10 (SIG) w0.18: R601.2@23.675,58.217 28.128,62.67 30.922,62.67 31.69,63.438 31.69,63.99 v1(32.1,64.4)
  other v1: 50.799,57.645
DDR_A2: R602.2 U300.M3 U700.P3 U701.P3 | length 122
  S1 (SIG) w0.11: v1(54.688,55.995) U300.M3@55.088,56.395
  S1 (SIG) w0.18: v1(27.175,49.325) 27.832,49.982 27.832,50.68 28.447,51.295 29.911,51.295 30.246,50.96 31.71,50.96 U701.P3@32.5,51.75 ; v1(32.1,66.8) U700.P3@32.5,67.2
  S3 (SIG) w0.119: v1(27.175,49.325) 26.54,49.96 26.54,51.524 26.751,51.735 27.282,51.735 27.351,51.665 28.499,51.665 29.26,52.426 29.26,52.762 27.61,54.412 27.61,54.749 27.399,54.96 27.101,54.96 26.961,54.819 24.571,54.819 24.33,55.06 24.33,55.084 23.621,55.792 22.779,55.792 22.297,55.31 21.19,55.31 21.038,55.462 20.995,55.505 20.89,55.505 20.775,55.389 20.669,55.389 20.511,55.548 20.511,55.653 20.783,55.926 20.783,56.031 20.625,56.19 20.519,56.19 20.247,55.917 20.141,55.917 19.983,56.076 19.983,56.181 20.255,56.454 20.255,56.559 20.097,56.717 19.992,56.717 19.719,56.445 19.614,56.445 19.455,56.603 19.455,56.709 19.728,56.981 19.728,57.087 19.569,57.245 19.464,57.245 19.191,56.973 19.086,56.973 18.927,57.131 18.927,57.237 19.2,57.509 19.2,57.615 19.042,57.773 18.936,57.773 18.664,57.501 18.558,57.501 18.4,57.659 18.4,57.764 18.672,58.037 18.672,58.142 18.514,58.301 18.408,58.301 18.136,58.028 18.03,58.028 17.872,58.187 17.872,58.292 18.144,58.565 18.144,58.67 17.986,58.829 17.881,58.829 17.608,58.556 17.502,58.556 17.344,58.714 17.344,58.82 17.617,59.092 17.617,59.198 17.458,59.356 17.353,59.356 17.08,59.084 16.975,59.084 16.816,59.242 16.816,59.348 17.126,59.658 17.126,59.763 16.968,59.921 16.862,59.921 16.699,59.758 16.594,59.758 16.435,59.917 16.435,60.022 16.703,60.29 16.703,60.675 16.703,65.228 18.921,67.446 23.41,67.446 23.992,66.865 26.222,66.865 26.533,66.554 26.791,66.554 27.203,66.142 27.814,66.142 28.86,65.096 29.34,65.096 29.679,65.435 29.679,65.471 29.877,65.669 30.988,65.669 32.1,66.781 v1(32.1,66.8)
  S8 (SIG) w0.1: 54.648,48.45 57.043,50.845 57.233,50.845 57.438,51.05 57.438,51.24 57.782,51.585 57.972,51.585 58.317,51.929 58.317,52.919 58.638,53.24 58.638,55.223 57.538,56.323 57.538,56.84 57.233,57.145 55.343,57.145 55.042,56.844 55.042,56.349 v1(54.688,55.995)
  S8 (SIG) w0.119: v1(27.175,49.325) 27.175,48.746 32.06,43.862 50.059,43.862 50.336,44.139 50.648,44.45 50.781,44.45 50.992,44.24 51.125,44.24 51.435,44.55 51.435,44.683 51.054,45.065 51.054,45.198 51.364,45.508 51.497,45.508 51.879,45.127 52.012,45.127 52.322,45.437 52.322,45.57 51.941,45.952 51.941,46.085 52.251,46.395 52.384,46.395 52.766,46.014 52.899,46.014 53.209,46.324 53.209,46.457 52.999,46.668 52.999,46.801 53.041,46.843 54.648,48.45
  S10 (SIG) w0.18: R602.2@23.675,72.246 25.856,70.064 25.856,70.025 29.472,66.41 31.71,66.41 v1(32.1,66.8)
DDR_A3: R603.2 U300.K3 U700.N2 U701.N2 | length 119
  S1 (SIG) w0.11: 51.9,58.48 53.265,58.48 53.33,58.415 54.679,58.415 55.088,58.006 U300.K3@55.088,57.995
  S1 (SIG) w0.18: U701.N2@33.3,52.55 33.361,52.55 33.7,52.211 v1(33.7,52.15) ; U700.N2@33.3,68 v1(33.7,67.6) ; v1(50.368,58.4) 50.428,58.4 50.508,58.48 51.9,58.48
  S3 (SIG) w0.119: v1(33.7,52.15) 33.749,52.199 33.749,52.398 34.06,52.708 34.06,53.899 33.344,54.614 31.874,54.614 31.6,54.888 31.11,54.888 31.012,54.986 30.639,54.986 30.488,55.137 30.445,55.18 30.34,55.18 30.313,55.153 30.207,55.153 30.049,55.311 30.049,55.417 30.156,55.523 30.156,55.629 29.997,55.787 29.892,55.787 29.834,55.73 29.729,55.73 29.57,55.888 29.57,55.994 29.709,56.132 29.709,56.238 29.551,56.396 29.445,56.396 29.39,56.341 29.284,56.341 29.175,56.45 29.175,56.7 29.175,56.76 29.1,56.834 28.699,56.834 28.624,56.909 28.624,57.133 28.699,57.207 29.102,57.207 29.176,57.282 29.176,57.506 29.102,57.581 26.944,57.581 26.869,57.655 26.869,57.879 26.944,57.954 29.102,57.954 29.176,58.028 29.176,58.252 29.102,58.327 26.944,58.327 26.869,58.402 26.869,58.626 26.944,58.7 29.101,58.7 29.176,58.775 29.176,58.999 29.101,59.073 26.944,59.073 26.869,59.148 26.869,59.372 26.944,59.447 29.101,59.447 29.175,59.521 29.175,59.745 29.101,59.82 26.944,59.82 26.869,59.894 26.869,60.118 26.944,60.193 29.1,60.193 29.175,60.268 29.175,60.459 29.175,60.694 29.245,60.764 31.012,60.764 31.231,60.983 32.211,60.983 32.65,61.421 33.94,61.421 34.279,61.76 34.279,62.24 34.06,62.459 34.06,63.749 33.125,64.684 33.125,64.987 33.125,65.291 33.135,65.301 33.135,65.599 33.125,65.609 33.125,65.793 33.05,65.868 31.944,65.868 31.87,65.943 31.87,66.167 31.944,66.241 33.302,66.241 33.377,66.316 33.377,66.54 33.302,66.614 32.534,66.614 32.46,66.689 32.46,66.913 32.534,66.988 33.088,66.988 33.241,67.141 v1(33.7,67.6)
  S8 (SIG) w0.119: v1(33.7,52.15) 32.354,53.496 32.46,53.601 32.46,53.899 32.249,54.11 32.075,54.11 32.075,56.325 32.288,56.537 32.33,56.58 32.33,56.685 31.49,57.525 31.49,57.63 31.649,57.789 31.754,57.789 33.268,56.275 33.373,56.275 33.532,56.433 33.532,56.539 32.018,58.052 32.018,58.158 32.176,58.316 32.282,58.316 33.891,56.707 33.997,56.707 34.155,56.865 34.155,56.971 32.587,58.539 32.587,58.645 32.745,58.803 32.851,58.803 34.419,57.235 34.525,57.235 34.683,57.393 34.683,57.498 33.642,58.539 33.642,58.645 33.801,58.803 33.906,58.803 34.993,57.716 35.099,57.716 35.257,57.875 35.257,57.98 34.698,58.539 34.698,58.645 34.856,58.803 34.962,58.803 35.438,58.327 35.679,58.327 36.475,58.327 36.535,58.327 36.609,58.402 36.609,58.781 36.684,58.856 36.908,58.856 36.982,58.781 36.982,58.402 37.057,58.327 37.281,58.327 37.356,58.402 37.356,58.781 37.43,58.856 37.654,58.856 37.729,58.781 37.729,58.402 37.803,58.327 38.027,58.327 38.102,58.402 38.102,58.781 38.177,58.856 38.401,58.856 38.475,58.781 38.475,58.402 38.55,58.327 38.774,58.327 38.848,58.402 38.848,58.781 38.923,58.856 39.147,58.856 39.222,58.781 39.222,58.402 39.296,58.327 39.52,58.327 39.595,58.402 39.595,58.781 39.669,58.856 39.893,58.856 39.968,58.781 39.968,58.402 40.043,58.327 40.267,58.327 40.341,58.402 40.341,58.781 40.416,58.856 40.64,58.856 40.714,58.781 40.714,58.402 40.789,58.327 41.013,58.327 41.088,58.402 41.088,58.781 41.162,58.856 41.386,58.856 41.461,58.781 41.461,58.402 41.535,58.327 41.759,58.327 41.834,58.402 41.834,58.781 41.909,58.856 42.132,58.856 42.207,58.781 42.207,58.402 42.282,58.327 42.506,58.327 42.58,58.402 42.58,58.781 42.655,58.856 42.879,58.856 42.953,58.781 42.953,58.402 43.028,58.327 43.252,58.327 43.327,58.402 43.327,58.781 43.401,58.856 43.625,58.856 43.7,58.781 43.7,57.694 43.775,57.619 43.998,57.619 44.073,57.694 44.073,58.253 44.148,58.327 45.875,58.327 50.097,58.327 50.116,58.346 50.315,58.346 v1(50.368,58.4)
  S10 (SIG) w0.18: R603.2@23.675,74.405 26.416,71.663 26.416,70.257 29.413,67.26 33.36,67.26 v1(33.7,67.6)